# Altium PCB WB-AV-4510-CAN.PcbDoc (part 2 of 2)
Units mil, origin at the board's own origin, x right, y up, seen from the top; angles counter-clockwise.
Board outline 5777.56 x 2549.21 mil, 2 copper layers (Top Layer, Bottom Layer); 81 components, 160 nets, 544 pads, 0 vias.
Unrouted connection lines stored in the file: 266.
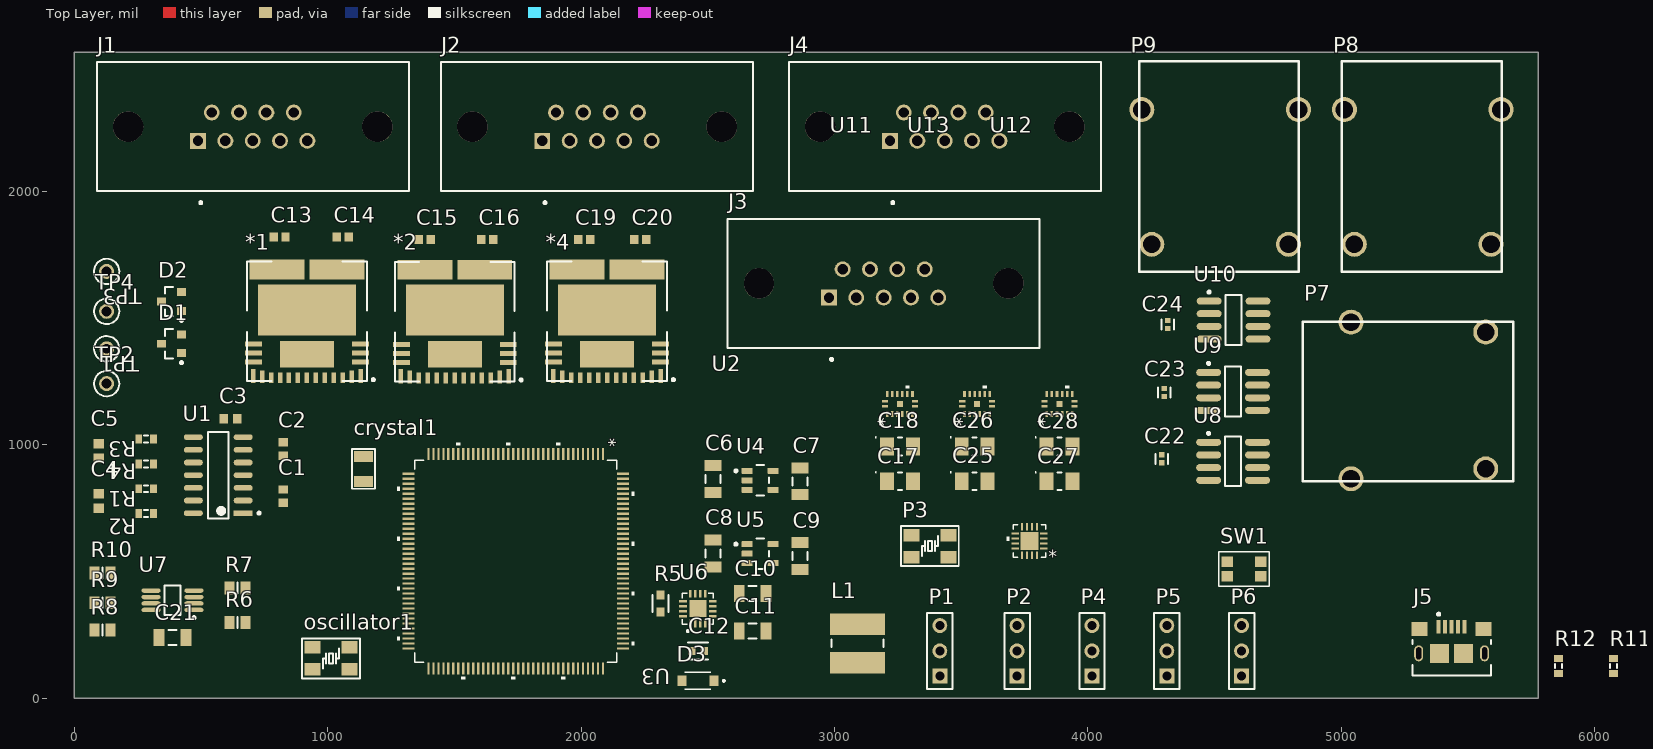
[diagram p0: Top Layer view]

## Nets (pads, with @x,y where several pads share a name; then routed paths per layer and width w, separated by ;. In a path a pad name is that pad's centre, name@x,y a point inside that pad or via, vN(x,y) a via of type N, cw(c..) or ccw(c..) an arc to the next point about the centre after c; other vN are vias at no path point)
3.3V: C3.2 U1.11 U2.1
3.3V_D: U3.42 U3.43 U3.56 U3.70 U3.94 U3.108 U3.122
+3.3V: U8.4 U9.4 U10.4
+3.3V_A: C9.2 C18.1 C26.1 C28.1 U3.31 U5.5 U11.9 U12.9 U13.9
+3.3V_D: *1.13 *2.13 *4.13 C7.2 C21.2 R5.1 R6.2 R7.2 U3.5 U3.16 U3.135 U4.5 U7.8
+5: C1.2 C2.2 C6.2 C8.2 C10.2 C11.2 L1.2 U1.3 U4.1 U4.3 U5.1 U5.3 U6.5
+24: J1.3 J1.6 U6.2 U6.3 U6.11
+24V: *1.21 *2.21 *4.21 C17.1 C25.1 C27.1 U11.15 U12.15 U13.15
ADC0_DM0: U3.28
ADC0_SE21: U3.36
ADC0_SE22: U3.35
ADC1_DM0: U3.30
ADC1_DP0: U3.29
AGND: U3.33 U3.34
BReset_b: P2.1 U2.4 U2.13
BSWCLK: P5.1 U2.8
BSWDIO: P6.1 U2.7
BSWO: P4.1 U2.9
CAN1_N: D1.2 J1.1 R1.2 TP1.1 U1.12
CAN1_P: D1.1 J1.2 R2.1 TP2.1 U1.13
CAN1_STBN: U1.14 U3.47
CAN2_N: D2.2 J1.8 R3.2 TP3.1 U1.9
CAN2_P: D2.1 J1.9 R4.1 TP4.1 U1.10
CAN2_STBN: U1.8 U3.63
GND: *1.17 *2.17 *4.17 C1.1 C2.1 C3.1 C4.1 C5.1 C6.1 C7.1 C8.1 C9.1 C10.1 C11.1 C13.1 C14.1 C15.1 C16.1 C17.2 C18.2 C19.1 C20.1 C21.1 C25.2 C26.2 C27.2 C28.2 D1.3 D2.3 D3.A J1.4 J1.7 J5.6 J5.7 J5.8 J5.9 J5.10 J5.11 R8.2 R9.2 R10.2 SW1.1 U1.2 U1.5 U2.2 U2.17 U3.6 U3.17 U3.18 U3.44 U3.57 U3.71 U3.93 U3.107 U3.121 U3.134 U4.2 U5.2 U6.4 U6.14 U6.15 U6.17 U7.4 U8.1 U9.1 U10.1 U11.2 U11.4 U11.6 U11.11 U11.12 U11.13 U11.14 U11.16 U12.2 U12.4 U12.6 U12.11 U12.12 U12.13 U12.14 U12.16 U13.2 U13.4 U13.6 U13.11 U13.12 U13.13 U13.14 U13.16
NetC4_2: C4.2 R1.1 R2.2
NetC5_2: C5.2 R3.1 R4.2
NetC12_1: C12.1 U6.10
NetC12_2: C12.2 D3.C L1.1 U6.1 U6.12 U6.13 U6.16
Netcrystal1_1: crystal1.1 U3.40
Netcrystal1_2: crystal1.2 U3.41
NetJ5_2: J5.2 R11.1
NetJ5_3: J5.3 R12.1
Netoscillator1_1: oscillator1.1 U3.72
Netoscillator1_3: oscillator1.3 U3.73
NetP1_1: P1.1 U2.6
NetP3_5: P4.3
NetP3_7: P5.3
NetP3_9: P6.3
NetR8_1: R8.1 U7.7
NetR9_1: R9.1 U7.6
NetR10_1: R10.1 U7.5
NetSW1_2: SW1.2 U2.10
NetU1_1: U1.1 U3.45
NetU1_4: U1.4 U3.46
NetU3_106: U3.106 U8.6
NetU3_109: U3.109
NetU3_110: U3.110 U8.5 U9.5 U10.5
NetU3_111: U3.111
NetU3_112: U3.112 U8.7 U9.7 U10.7
PG: R5.2 U6.8
PTA0: P5.2 U3.50
PTA1: P1.2 U3.51
PTA2: P4.2 U3.52
PTA3: P6.2 U3.53
PTA4: U3.54
PTA5: U3.55
PTA6: U3.58
PTA7: U3.59
PTA8: U3.60
PTA9: U3.61
PTA10: U3.62
PTA12: U1.6 U3.64
PTA13: U1.7 U3.65
PTA16: U3.68
PTA17: U3.69
PTA24: U3.75 U11.7
PTA25: U3.76 U11.8
PTA26: U3.77 U12.7
PTA27: U3.78 U12.8
PTA28: U3.79 U13.7
PTA29: U3.80 U13.8
PTB0: U3.81
PTB1: U3.82
PTB2: R7.1 U3.83 U7.2
PTB3: R6.1 U3.84 U7.1
PTB4: U3.85
PTB5: U3.86
PTB6: U3.87
PTB7: U3.88
PTB8: U3.89
PTB9: U3.90
PTB10: U3.91
PTB11: U3.92
PTB18: U3.97
PTB19: U3.98
PTB20: U3.99
PTB21: U3.100
PTB22: U3.101
PTB23: U3.102
PTC0: U3.103
PTC1: U3.104 U10.6
PTC2: U3.105 U9.6
PTC8: U3.113
PTC9: U3.114
PTC10: U3.115
PTC11: U3.116
PTC12: U3.117
PTC13: U3.118
PTC14: U3.119
PTC15: U3.120
PTC19: U3.126
PTD1: U3.128
PTD2: U3.129
PTD4: U3.131
PTD5: U3.132
PTD6: U3.133
PTD7: U3.136
PTD8: U3.137
PTD9: U3.138
PTD10: U3.139 U13.5
PTD11: U3.140 U11.5
PTD12: U3.141 U11.10 U12.10 U13.10
PTD13: U3.142
PTD14: U3.143
PTD15: U3.144 U12.5
PTE0: *1.10 U3.1
PTE1: *1.16 *2.16 *4.16 U3.2
PTE2: *1.11 *2.11 *4.11 U3.3
PTE3: *1.12 *2.12 *4.12 U3.4
PTE4: *2.10 U3.7
PTE5: U3.8
PTE6: *4.10 U3.9
PTE7: U3.10
PTE8: U3.11
PTE9: U3.12
PTE10: U3.13
PTE11: U3.14
PTE12: U3.15
PTE27: U3.48
PTE28: U3.49
Reset_b: P2.2 P2.3 P3.1 U3.74
Sensor_a1: J2.6
Sensor_a2: J2.7
Sensor_b1: J4.6
Sensor_b2: J4.7
Sensor_c1: J3.6 U13.1
Sensor_c2: J3.7 U13.3
T1+: C22.1 P7.13 U8.3
T1-: C22.2 P7.14 U8.2
T2+: C23.1 P8.13 U9.3
T2-: C23.2 P8.14 U9.2
T3+: C24.1 P9.13 U10.3
T3-: C24.2 P9.14 U10.2
USB0_DM: R11.2 U3.20
USB0_DP: R12.2 U3.19
USB1_VSS: U3.24
Vout_a1: *1.20 C14.2 J2.2
Vout_a2: *1.19 C13.2 J2.1
Vout_b1: *2.20 C16.2 J4.2
Vout_b2: *2.19 C15.2 J4.1
Vout_c1: J3.2
Vout_c2: J3.1
Vout_d1: *4.20 C20.2
Vout_d2: *4.19 C19.2
VREF_OUT: U3.37
VREFH: U3.32
VREG_IN0: U3.22
VREG_IN1: U3.23
VREG_OUT: U3.21
pads on no net: *1.1 *1.2 *1.3 *1.4 *1.5 *1.6 *1.7 *1.8 *1.9 *1.14 *1.15 *1.18 *1.22 *1.23 *2.1 *2.2 *2.3 *2.4 *2.5 *2.6 *2.7 *2.8 *2.9 *2.14 *2.15 *2.18 *2.22 *2.23 *4.1 *4.2 *4.3 *4.4 *4.5 *4.6 *4.7 *4.8 *4.9 *4.14 *4.15 *4.18 *4.22 *4.23 J1. J1.5 J2. J2.3 J2.4 J2.5 J2.8 J2.9 J3. J3.3 J3.4 J3.5 J3.8 J3.9 J4. J4.3 J4.4 J4.5 J4.8 J4.9 J5.1 J5.4 J5.5 oscillator1.2 oscillator1.4 P1.3 P3.2 P3.3 P3.4 P7.15 P7.16 P8.15 P8.16 P9.15 P9.16 U2.3 U2.5 U2.11 U2.12 U2.14 U2.15 U2.16 U3.25 U3.26 U3.27 U3.38 U3.39 U3.66 U3.67 U3.95 U3.96 U3.123 U3.124 U3.125 U3.127 U3.130 U4.4 U5.4 U6.6 U6.7 U6.9 U7.3 U8.8 U9.8 U10.8 U11.1 U11.3 U11.17 U12.1 U12.3 U12.17 U13.17

## Text inside footprints (layer, text, board x,y; h text height)
U2: Top Overlay "*" at 3878.24,605.71 h50 r180; Mechanical 7 "Default Padstyle: RX7p81Y29p72D0T" at 4182.19,1001.13 h50 r180; Mechanical 7 "Heat Tab Padstyle: RX70p87Y70p87D0T" at 4207.19,1061.13 h50 r180; Mechanical 7 "Alt 1 Padstyle: OX60Y90D30P" at 4107.19,1181.13 h50 r180; Mechanical 7 "Alt 2 Padstyle: OX90Y60D30P" at 4107.19,1241.13 h50 r180; Mechanical 7 "0.02in/0.5mm" at 3584.63,612.89 h25 r180; Mechanical 7 "0.018in/0.45mm" at 3806.99,435.02 h25 r180; Mechanical 7 "0.118in/3mm" at 3838.43,360.02 h25 r180; Mechanical 7 "0.118in/3mm" at 3509.63,632.58 h25 r180; Mechanical 7 "0.118in/3mm" at 4117.24,632.58 h25 r180; Mechanical 7 "0.118in/3mm" at 3838.43,855.13 h25 r180; Mechanical 13 "*" at 3823.52,605.71 h50 r180
U3: Top Overlay "*" at 2086.46,1025.61 h50 r270; Mechanical 13 "*" at 2071.46,932.11 h50 r270
U11: Top Overlay "*" at 3222.72,1072.55 h50 r90; Mechanical 7 "0.079in/2.007mm" at 3492.72,1067.8 h25 r90; Mechanical 7 "0.118in/2.997mm" at 3270.22,783.55 h25 r90; Mechanical 7 "0.118in/2.997mm" at 3270.22,1402.05 h25 r90; Mechanical 7 "0.079in/2.007mm" at 2997.72,1067.8 h25 r90; Mechanical 7 "0.012in/0.305mm" at 3072.72,1101.3 h25 r90; Mechanical 7 "0.02in/0.508mm" at 3230.22,1327.05 h25 r90; Mechanical 7 "Alt 2 Padstyle: OX90Y60D30P" at 3878.72,824.05 h50 r90; Mechanical 7 "Alt 1 Padstyle: OX60Y90D30P" at 3818.72,824.05 h50 r90; Mechanical 7 "Heat Tab Padstyle: RX24Y24D0T" at 3698.72,799.05 h50 r90; Mechanical 7 "Default Padstyle: RX10Y24D0T" at 3638.72,811.55 h50 r90; Mechanical 13 "*" at 3222.72,1121.55 h50 r90
U12: Top Overlay "*" at 3852.8,1072.42 h50 r90; Mechanical 7 "0.079in/2.007mm" at 4122.8,1067.67 h25 r90; Mechanical 7 "0.118in/2.997mm" at 3900.3,783.42 h25 r90; Mechanical 7 "0.118in/2.997mm" at 3900.3,1401.92 h25 r90; Mechanical 7 "0.079in/2.007mm" at 3627.8,1067.67 h25 r90; Mechanical 7 "0.012in/0.305mm" at 3702.8,1101.17 h25 r90; Mechanical 7 "0.02in/0.508mm" at 3860.3,1326.92 h25 r90; Mechanical 7 "Alt 2 Padstyle: OX90Y60D30P" at 4508.8,823.92 h50 r90; Mechanical 7 "Alt 1 Padstyle: OX60Y90D30P" at 4448.8,823.92 h50 r90; Mechanical 7 "Heat Tab Padstyle: RX24Y24D0T" at 4328.8,798.92 h50 r90; Mechanical 7 "Default Padstyle: RX10Y24D0T" at 4268.8,811.42 h50 r90; Mechanical 13 "*" at 3852.8,1121.42 h50 r90
U13: Top Overlay "*" at 3527.83,1072.55 h50 r90; Mechanical 7 "0.079in/2.007mm" at 3797.83,1067.8 h25 r90; Mechanical 7 "0.118in/2.997mm" at 3575.33,783.55 h25 r90; Mechanical 7 "0.118in/2.997mm" at 3575.33,1402.05 h25 r90; Mechanical 7 "0.079in/2.007mm" at 3302.83,1067.8 h25 r90; Mechanical 7 "0.012in/0.305mm" at 3377.83,1101.3 h25 r90; Mechanical 7 "0.02in/0.508mm" at 3535.33,1327.05 h25 r90; Mechanical 7 "Alt 2 Padstyle: OX90Y60D30P" at 4183.83,824.05 h50 r90; Mechanical 7 "Alt 1 Padstyle: OX60Y90D30P" at 4123.83,824.05 h50 r90; Mechanical 7 "Heat Tab Padstyle: RX24Y24D0T" at 4003.83,799.05 h50 r90; Mechanical 7 "Default Padstyle: RX10Y24D0T" at 3943.83,811.55 h50 r90; Mechanical 13 "*" at 3527.83,1121.55 h50 r90